# Altium PCB Copy of fotopolim_v0.PcbDoc
Units mm, origin at the board's own origin, x right, y up, seen from the top; angles counter-clockwise.
Board outline 25.02 x 150.11 mm, 2 copper layers (Top Layer, Bottom Layer), stack 1.671 mm thick; 41 components, 27 nets, 125 pads, 0 vias.
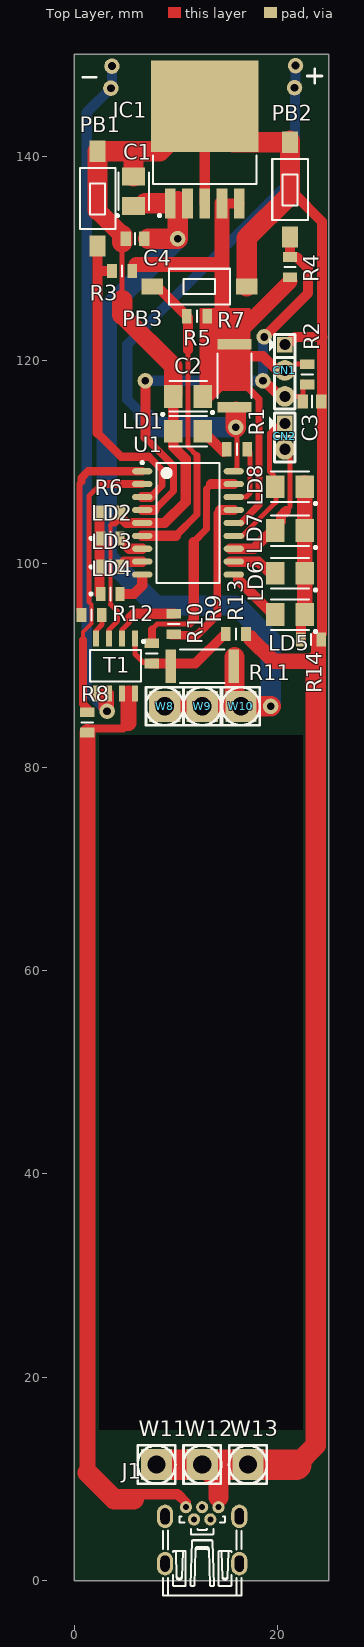
[diagram p0: Top Layer view]
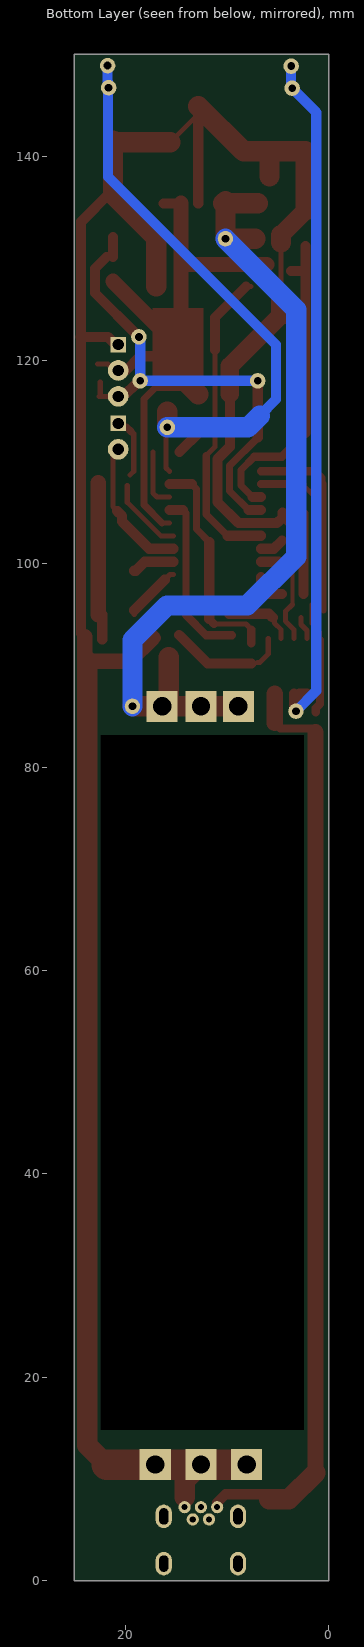
[diagram p1: Bottom Layer view, seen from below]

## Layer stack, top to bottom
Top Layer: signal copper 0.0356
Dielectric: core 1.6, FR-4, Dk 4.8
Bottom Layer: signal copper 0.0356

## Board outline
0,0 0,150.114 25.019,150.114 25.019,0

## Design rules (kind name [scope] priority, off if disabled: settings)
Clearance [All] p1: gap=0.25
PolygonConnect [All] p1: connectstyle=Relief reliefconductorwidth=0.254 reliefentries=4 polygonreliefangle="90 Angle" airgapwidth=0.254
RoutingVias [All] p1: holewidth=0.711 width=1.27 viastyle="Through Hole" minholewidth=0.711 minwidth=1.27 maxholewidth=0.711 maxwidth=1.27
SolderMaskExpansion [All] p1: expansion=0.102
Width [All] p1: maxlimit=5.254 minlimit=0.254 preferedwidth=2
28 further rules are at their usual default settings.

## Components (designator, comment, footprint, x,y, rotation, side; value= is the part's Value field where it differs from the comment)
C1 "10uF" CAPMP3528X210N 5.825,136.625 r90 top
C2 "10uF" CAPMP3528X210N 11.192,116.459 r180 top
C3 "100nF" CAPC2012X135N 23.368,115.951 r180 top
C4 "100nF" CAPC2012X135N 5.969,131.953 r0 top
CN1 "BARRA DE PINOS 1x3 180°" "BARRA DE PINOS 1X3 180 - MACHO" 20.701,121.539 r270 top
CN2 "BARRA DE PINOS 1x2 180°" "BARRA DE PINOS 1X2 180 - MACHO" 20.701,113.792 r270 top
IC1 "LT1764AEQ-3.3#PBF" TO170P1394X457-6N-R900X1060 12.827,141.732 r90 top
J1 "USB" WURTH_651005136521 12.573,7.239 r0 top
LD1 "Red" LEDM3528X210N_RED 11.192,113.03 r0 top
LD2 "Green" LED_OSRAM_LGR971 3.556,102.489 r0 top
LD3 "Green" LED_OSRAM_LGR971 3.556,99.695 r0 top
LD4 "Green" LED_OSRAM_LGR971 3.556,97.028 r0 top
LD5 "Yellow" LEDM3528X210N_YELLOW 21.209,94.996 r180 top
LD6 "Yellow" LEDM3528X210N_YELLOW 21.209,99.06 r180 top
LD7 "Yellow" LEDM3528X210N_YELLOW 21.209,103.251 r180 top
LD8 "Yellow" LEDM3528X210N_YELLOW 21.209,107.569 r180 top
PB1 "Push Button" PB_TYCO_FSMSM 2.286,135.89 r270 top
PB2 "Push Button" PB_TYCO_FSMSM 21.209,136.779 r270 top
PB3 "Push Button" PB_TYCO_FSMSM 12.319,127.254 r180 top
R1 "330" RESC2012X60N 16.002,111.252 r0 top
R2 "10k" RESC2012X60N 22.9,118.625 r270 top
R3 "4k7" RESC2012X60N 4.699,128.778 r0 top
R4 "4k7" RESC2012X60N 21.209,129.159 r270 top
R5 "4k7" RESC2012X60N 12.065,124.333 r0 top
R6 "330" RESC2012X60N 3.556,105.029 r180 top
R7 "360" RESC6331X70N 15.748,118.491 r270 top
R8 "10k" RESC2012X60N 1.275,84.4 r270 top
R9 "4k7" RESC2012X60N 9.779,94.075 r270 top
R10 "4k7" RESC2012X60N 7.62,91.186 r270 top
R11 "47" RESC6331X70N 12.573,89.916 r0 top
R12 "4k7" RESC2012X60N 1.7,94.95 r0 top
R13 "10k" RESC2012X60N 15.875,93.091 r180 top
R14 "330" RESC2012X60N 23.275,92.55 r180 top
T1 "IRF9910Pbf" SOIC127P600X175-8N 4.05,89.95 r270 top
U1 "PIC16F628A-E/SO" SOIC-SO18_L 11.176,104.013 r0 top
W8 "CABO COM CLIP" "CABINHO COM CLIP" 8.89,85.979 r0 top
W9 "CABO COM CLIP" "CABINHO COM CLIP" 12.573,85.979 r0 top
W10 "CABO COM CLIP" "CABINHO COM CLIP" 16.383,85.979 r0 top
W11 "CABO COM CLIP" "CABINHO COM CLIP" 8.077,11.43 r0 top
W12 "CABO COM CLIP" "CABINHO COM CLIP" 12.573,11.43 r0 top
W13 "CABO COM CLIP" "CABINHO COM CLIP" 17.069,11.43 r0 top

## Footprints (in the part's own frame and the unit in brackets; to place one, negate y for a bottom-side part, rotate by r counter-clockwise, add the part's x,y. Pads: shape width x height; smd on the part's side, far side on the other; paste and mask are expansions set on the pad)
"BARRA DE PINOS 1X2 180 - MACHO" [mil]
  rect 60x60 hole 43: 1(0,0)
  round 80 hole 43: 2(100,0)
  silkscreen extent -40,-60 149,40, body extent -49,-48 151,50, height 305
"BARRA DE PINOS 1X3 180 - MACHO" [mil]
  rect 60x60 hole 43: 1(0,0)
  round 80 hole 43: 2(100,0) 3(200,0)
  silkscreen extent -40,-60 249,40, body extent -49,-50 251,48, height 305
"CABINHO COM CLIP" [mm]
  rect 3.064x3.064 hole 1.8: 1(0,0)
  silkscreen extent -1.87,-1.87 1.87,1.89
CAPC2012X135N [mm] "Chip Capacitor, Body 2.0x1.25mm, IPC Medium Density"
  rect 1.05x1.4 smd: 1(-0.9,0) 2(0.9,0)
  silkscreen extent 0,-0.58 0,0.58, body extent -1.05,-0.67 1.05,0.68, height 1.25
CAPMP3528X210N [mm] "Capacitor, Polarized, Molded  Body 3.5x2.8mm, IPC Medium Density"
  rect 1.8x2.25 smd: 1(-1.45,0) 2(1.45,0)
  silkscreen extent -2.52,-1.5 1.85,1.72, body extent -1.85,-1.5 1.85,1.5, height 2.1
LED_OSRAM_LGR971 [mm] "Green Chip LED, 2-Leads, Body 2.0x1.25mm, IPC Medium Density"
  rect 0.9x1.4 smd: 1(-0.95,0) 2(0.95,0)
  silkscreen extent -2.02,-0.65 0,0.65, body extent -1.05,-0.67 1.05,0.68, height 0.9
LEDM3528X210N_RED [mm] "Molded SMD RED LED, 2-Leads, Body 3.5x2.8mm, IPC Medium Density"
  rect 1.8x2.25 smd: 1(-1.45,0) 2(1.45,0)
  silkscreen extent -2.62,-1.5 1.85,1.77, body extent -1.85,-1.5 1.85,1.5, height 2.1
LEDM3528X210N_YELLOW [mm] "Molded SMD YELLOW LED, 2-Leads, Body 3.5x2.8mm, IPC Medium Density"
  rect 1.8x2.25 smd: 1(-1.45,0) 2(1.45,0)
  silkscreen extent -2.63,-1.5 1.85,1.77, body extent -1.85,-1.5 1.85,1.5, height 2.1
PB_TYCO_FSMSM [mm] "Body 3.5x6.0mm, Pushbutton Switch,  TYCO FSMSM Serie"
  rect 2.1x1.6 smd: 1(-4.65,0) 2(4.65,0)
  silkscreen extent -3,-1.75 3,1.75, body extent -5,-1.75 5,1.75, height 4.3
RESC2012X60N [mm] "Chip Resistor, EIA 0805, Metric 2012, Body 2.0x1.2mm, IPC Medium Density"
  rect 0.95x1.4 smd: 1(-1,0) 2(1,0)
  silkscreen extent 0,-0.55 0,0.55, body extent -1.1,-0.67 1.1,0.68, height 0.6
RESC6331X70N [mm] "Chip Resistor, EIA 2512, Metric 6331, 2-Leads, Body 6.3x3.1mm, IPC Medium Density"
  rect 1.05x3.3 smd: 1(-3.1,0) 2(3.1,0)
  silkscreen extent -2.2,-1.65 2.2,1.65, body extent -3.25,-1.65 3.25,1.65, height 0.7
SOIC127P600X175-8N [mm] "SOIC 8, Pitch 1.27mm - Body 4x5mm, IPC Medium Density"
  rect 1.55x0.6 smd: 1(-2.7,1.905) 2(-2.7,0.635) 3(-2.7,-0.635) 4(-2.7,-1.905) 5(2.7,-1.905) 6(2.7,-0.635) 7(2.7,0.635) 8(2.7,1.905)
  silkscreen extent -2.52,-2.5 1.55,2.88, body extent -3.1,-2.5 3.1,2.5, height 1.75
SOIC-SO18_L [mm] "SOIC, 18-Leads, Body 11.5x7.5mm, Pitch 1.27mm, IPC High Density"
  oval 2x0.6 smd: 1(-4.5,5.08) 2(-4.5,3.81) 3(-4.5,2.54) 4(-4.5,1.27) 5(-4.5,0) 6(-4.5,-1.27) 7(-4.5,-2.54) 8(-4.5,-3.81) 9(-4.5,-5.08) 10(4.5,-5.08) 11(4.5,-3.81) 12(4.5,-2.54) 13(4.5,-1.27) 14(4.5,0) 15(4.5,1.27) 16(4.5,2.54) 17(4.5,3.81) 18(4.5,5.08)
  silkscreen extent -4.62,-5.9 3.1,6.05, body extent -3.8,-5.95 3.8,5.95, height 2.65
TO170P1394X457-6N-R900X1060 [mm] "TO, 1.70mm Pitch; 5 Pin, 13.945mm L X 8.89mm W X 4.572mm H body, IPC Medium Density"
  rect 2.95x1.05 smd: 1(-6.3,3.4) 2(-6.3,1.7) 3(-6.3,0) 4(-6.3,-1.7) 5(-6.3,-3.4)
  rect 9x10.6 smd: 6(3.25,0)
  silkscreen extent -7.62,-5.1 -1.6,5.1, body extent -6.93,-5.27 7.11,5.27, height 4.63
WURTH_651005136521 [mm] "Mini USB Type B Horizontal 5 Contacts"
  round 1.2 hole 0.6: 1(-1.6,0) 2(-0.8,-1.2) 3(0,0) 4(0.8,-1.2) 5(1.6,0)
  oval 1.6x2.3 hole 0.9 slot 1.6 at 90 deg: 6(-3.65,-5.55) 6(-3.65,-0.9) 6(3.65,-5.55) 6(3.65,-0.9)
  silkscreen extent -3.85,-8.7 3.85,-0.9, body extent -4.07,-8.7 4.08,0.13, height 3.9

## Part data
C1 C2: library part CTE3528-21_10UF_16V_10%_LESR0800, "Polarised capacitor"
C3 C4: library part CC0805_100NF_50V_10%_X7R, "Non-polarised capacitor"
IC1: "3A, Fast Transient Response, Low Noise, LDO Regulators"
J1: library part WURTH_651005136521, "5 Pin + 1 Shield USB Receptacle"
LD1: library part LED_OSRAM_LST676-Q1R2-1, "LED Red 1C 2A"
LD2 LD3 LD4: library part LED_OSRAM_LGR971, "LED Green 1C 2A"
LD5 LD6 LD7 LD8: library part LED_OSRAM_LYT676-R1S2-26, "LED Yellow 1C 2A"
PB1 PB2 PB3: library part PB_TYCO_FSMSM, "Push-Button Switch SPDT"
R1 R6 R14: library part R0805_330R_0.1%_0.1W_25PPM, "Resistor - 0.1%"
R2 R8 R13: library part R0805_10K_1%_0.125W_100PPM, "Resistor - 1%"
R3 R4 R5 R9 R10 R12: library part R0805_4K7_1%_0.125W_100PPM, "Resistor - 1%"
R7: library part R2512_360R_1%_1W_100PPM, "Resistor - 1%"
R11: library part R2512_47R_1%_1W_100PPM, "Resistor - 1%"
T1: "Dual SO-8 MOSFET For POL Cconverter"
U1: "FLASH-Based 8-Bit CMOS Microcontroller with nanoWatt Technology, 2K (x14-Bit words) FLASH, 224 Bytes SRAM, 18-Pin SOIC, 3.0 to 5.5V Supply Range, Extended Temperature"

## Free pads (board coordinates)
  round 1.524 hole 0.762: 0(3.6,146.75) 0(3.7,148.925) 0(10.16,131.953) 0(15.875,113.411) 0(19.304,85.979) 0(21.65,146.8) 0(21.75,148.975) 1(3.225,85.5) 2(6.985,117.983) 3(18.542,117.983) 4(18.669,122.301)
  rect 1.524x1.524 hole 20 square unplated: 0(12.443,24.876) 0(12.443,34.02) 0(12.443,53.578) 0(12.443,73.136)

## Nets (pads, with @x,y where several pads share a name; then routed paths per layer and width w, separated by ;. In a path a pad name is that pad's centre, name@x,y a point inside that pad or via, vN(x,y) a via of type N, cw(c..) or ccw(c..) an arc to the next point about the centre after c; other vN are vias at no path point)
BAT: C1.1 C4.2 IC1.1 IC1.2 pad.0@10.16,131.953 pad.0@19.304,85.979 R11.2 W8.1 W9.1 W10.1 | length 86
  Top Layer w2: 6.961,135.432 IC1.1 10.16,135.432 ; C4.2@7.239,131.953 10.16,131.953 10.16,135.432 ; W8.1 W9.1 W10.1 ; R11.2@15.748,90.805 15.748,86.614 W10.1 ; pad.0@19.304,85.979 W10.1 ; 10.16,135.432 10.364,135.432 10.16,135.636 10.16,135.432
  Bottom Layer w2: pad.0@10.16,131.953 3.2,124.993 3.2,100.7 8,95.9 15.9,95.9 19.304,92.496 pad.0@19.304,85.979
GND: C1.2 C2.2 C3.1 C4.1 CN1.1 IC1.3 IC1.6 J1.5 LD1.1 PB1.1 PB2.1 PB3.1 R6.1 R13.1 R14.1 T1.3 U1.5 W11.1 W12.1 W13.1 | length 267.4
  Top Layer w0.4: 3.575,96 3.575,103.775
  Top Layer w0.5: T1.3 3.415,93.515 4.25,94.35 4.25,95.325 3.575,96 ; 3.575,103.775 3.95,104.15 ; R6.1@4.318,104.521 R6.1@4.318,105.156 ; 4.699,125.889 C4.1@4.699,131.583 ; IC1.6@12.827,144.198 IC1.6@15.596,141.429
  Top Layer w1: 3.95,104.15 3.95,104.153 R6.1@4.318,104.521 ; R6.1 4.556,104.537 5.08,104.013 U1.5 8.89,104.013 10.95,106.073 10.95,110.282 9.726,111.506 C2.2@9.726,116.713 ; IC1.3 12.827,144.198 IC1.6 ; J1.5 14.173,8.223 ; R13.1@17.002,92.71 R13.1@17.29,92.71 ; CN1.1 20.955,121.539 21.717,122.301 24.384,122.301 ; 21.463,136.525 24.35,133.638 24.35,93.168 R14.1@24,92.818
  Top Layer w1.5: R13.1@17.29,92.71 19.576,90.424 24,90.424 R14.1@24,92.818
  Top Layer w1.8: 2.286,134.736 C4.1@4.699,132.323 ; 4.699,124.46 9.726,119.433 C2.2@9.726,116.713
  Top Layer w2: 2.286,134.736 PB1.1 6.223,140.54 ; 4.699,124.46 4.699,125.889 ; C4.1@4.699,131.583 C4.1@4.699,132.323 ; C1.2 5.825,140.142 6.223,140.54 ; W12.1 14.173,9.83 14.173,8.223 ; IC1.6 8.385,140.54 6.223,140.54 ; IC1.6@15.596,141.429 PB2.1 ; PB3.1 16.969,132.031 21.209,136.271 PB2.1@21.209,141.605 ; 21.844,11.43 23.749,13.335 23.749,90.424
  Top Layer w3: W11.1 W12.1 W13.1 21.844,11.43
NetC3_2: C3.2 CN1.3 pad.2 pad.3 pad.4 PB2.2 R2.2 R4.1 U1.4 | length 50.2
  Top Layer w0.5: CN1.3@20.193,116.459 C3.2@22.595,116.459 ; R4.1 R4.1@21.86,130.159 ; C3.2@22.468,116.586 R2.2@22.468,117.861
  Top Layer w0.7: 6.985,112.395 9.75,109.63 9.75,107.159 7.874,105.283
  Top Layer w1: U1.4 7.874,105.283 ; 6.985,112.395 pad.2 ; pad.3@18.796,117.856 CN1.3@20.193,116.459 ; pad.4@18.796,122.174 18.796,122.428 22.987,126.619 22.987,129.032 R4.1@21.86,130.159 ; R4.1 PB2.2
  Bottom Layer w1: pad.2 pad.3 18.542,122.174 pad.4
NetCN2_1: CN2.1 LD8.2 U1.13 | length 14.1
  Top Layer w0.5: U1.13@15.295,102.743 16.51,102.743 19.812,106.045 LD8.2@19.812,107.696 ; 19.375,113 19.177,112.802 19.177,109.093 19.558,108.712 ; CN2.1@20.447,113.792 CN2.1@21.082,113.792
  Top Layer w0.7: 19.418,112.968 19.899,113.449 20.104,113.449 CN2.1@20.447,113.792
NetCN2_2: CN2.2 LD7.2 U1.12 | length 13.6
  Top Layer w0.5: 20.8,105.2 21.209,105.609 21.209,110.871 CN2.2@21.463,111.125
  Top Layer w1: U1.12@15.295,101.473 17.653,101.473 20.32,104.14 20.32,104.695 20.8,105.175 20.8,105.2
NetLD1_2: LD1.2 R1.1 | length 2.9
  Top Layer w1: LD1.2 R1.1@14.674,110.998
NetLD2_1: LD2.1 LD3.1 LD4.1 R6.2 | length 7.9
  Top Layer w1: LD4.1@2.479,97.028 2.479,99.695 2.479,102.489 R6.2@2.479,104.952
NetLD2_2: LD2.2 U1.7 | length 2.4
  Top Layer w1: LD2.2@4.597,102.271 5.395,101.473 U1.7
NetLD3_2: LD3.2 U1.8 | length 2.2
  Top Layer w1: LD3.2@4.603,99.918 4.887,100.203 U1.8
NetLD4_2: LD4.2 U1.9 | length 3.2
  Top Layer w1: LD4.2@4.625,97.028 5.842,97.028 6.676,97.862 U1.9@6.676,98.679
NetLD5_1: LD5.1 LD6.1 LD7.1 LD8.1 R14.2 | length 15.8
  Top Layer w0.5: LD5.1@22.275,94.996 LD5.1
  Top Layer w1: R14.2@22.275,92.583 LD5.1@22.275,94.996
  Top Layer w1.5: LD5.1 LD8.1@22.659,107.95
NetLD5_2: LD5.2 U1.10 | length 5.7
  Top Layer w0.5: U1.10@15.295,98.933 15.617,98.933 16.125,98.425 ; LD5.2@19.124,94.996 LD5.2@19.124,95.426
  Top Layer w1: 16.125,98.425 LD5.2@19.124,95.426
NetLD6_2: LD6.2 U1.11 | length 4.2
  Top Layer w1: U1.11@15.295,100.203 18.098,100.203 18.987,99.314 LD6.2@19.124,99.314
NetPB1_2: PB1.2 R3.1 U1.3 | length 31.6
  Top Layer w0.7: 7.331,110.525 8.625,109.231 8.625,107.685 U1.3@7.493,106.553
  Top Layer w0.8: 2.286,112.839 4.6,110.525 7.331,110.525
  Top Layer w1: 2.286,112.839 PB1.2 ; 2.286,128.778 R3.1 ; U1.3 U1.3@7.493,106.553
NetPB3_2: PB3.2 R5.1 U1.6 | length 30.8
  Top Layer w0.5: PB3.2@7.653,127.27 PB3.2 PB3.2@8.144,127.254 ; 11.192,121.027 11.192,111.49 12.05,110.632
  Top Layer w0.7: 9.968,102.743 12.05,104.825 12.05,110.632
  Top Layer w1: U1.6 9.968,102.743 ; PB3.2@8.144,127.254 11.192,124.206 11.192,121.027
NetR1_2: R1.2 U1.16 | length 5.8
  Top Layer w0.5: U1.16 16.891,106.553 17.272,106.934 R1.2@17.272,110.998
NetR7_2: pad.0@15.875,113.411 pad.0@21.65,146.8 pad.0@21.75,148.975 R7.2 U1.18 | length 58
  Top Layer w0.5: U1.18 16.002,109.419 16.002,113.157 pad.0@15.875,113.411
  Top Layer w2: pad.0@15.875,113.411 R7.2@15.875,114.935
  Bottom Layer w1: 6.8,114.55 5.2,116.15 5.2,121.55 21.7,138.05 pad.0@21.7,147.425 ; pad.0@21.75,146.9 pad.0@21.75,148.975
  Bottom Layer w2: 6.8,114.55 7.939,113.411 pad.0@15.875,113.411
NetR8_1: R8.1 U1.2 | length 27.6
  Top Layer w0.4: 0.85,92.5 0.85,93.275 1.7,94.125 1.7,95.979 1.454,96.225
  Top Layer w0.5: 1.454,96.225 1.454,106.679 2.598,107.823
  Top Layer w0.8: 0.85,92.5 0.85,86.225 1.275,85.8 R8.1 ; 2.598,107.823 U1.2
NetR9_1: R9.1 T1.2 | length 7
  Top Layer w0.5: T1.2 4.685,93.51 5.35,94.175 5.35,94.9
  Top Layer w1: 5.5,94.7 5.875,95.075 R9.1
NetR9_2: R9.2 U1.15 | length 17.1
  Top Layer w0.7: 14.05,94.949 14.05,104.982 14.351,105.283
  Top Layer w0.8: R9.2@9.525,92.964 12.065,92.964 14.05,94.949
  Top Layer w1: 14.351,105.283 U1.15
NetR10_1: R10.1 U1.17 | length 22.1
  Top Layer w0.5: 7.62,93.545 8.15,94.075 11.271,94.075
  Top Layer w0.7: 11.75,102.15 13,103.4 13,107.361 13.462,107.823
  Top Layer w0.8: R10.1 7.62,93.545 ; 11.271,94.075 11.75,94.554
  Top Layer w1: 11.75,94.554 11.75,102.15 ; 13.462,107.823 U1.17
NetR10_2: R10.2 R11.1 R13.2 T1.1 | length 11.2
  Top Layer w0.5: T1.1 5.955,91.125 6.78,90.3 6.988,90.3 R10.2@6.985,90.297
  Top Layer w1: R10.2 11.902,90.186 R13.2@14.714,92.998
NetR12_1: R12.1 U1.1 | length 19.4
  Top Layer w0.6: R12.1@0.528,95.4 0.528,107.903 0.7,108.075
  Top Layer w0.8: 0.7,108.075 0.7,108.436 1.357,109.093 U1.1
NetR12_2: R12.2 T1.4 | length 2.3
  Top Layer w0.5: T1.4 2.145,93.445 2.725,94.025 R12.2@2.725,94.725
NetT1_5: pad.0@3.6,146.75 pad.0@3.7,148.925 pad.1 T1.5 T1.6 | length 69
  Top Layer w1: T1.5 2.85,87.25 ; 2.85,86.55 2.9,86.5 2.9,85.825 pad.1 3.415,85.69 T1.6
  Bottom Layer w1: pad.1 1.225,87.5 1.225,144.375 3.7,146.85 pad.0@3.7,148.925
VCC: C2.1 CN1.2 IC1.4 IC1.5 R2.1 R3.2 R4.2 R5.2 R7.1 U1.14 | length 68.9
  Top Layer w0.5: U1.14 U1.14@16.383,104.013 ; CN1.2@19.939,118.999 CN1.2 CN1.2@20.844,118.999 ; CN1.2@20.701,118.856 CN1.2@20.844,118.999 ; R4.2@21.209,127.762 R4.2 ; R2.1@22.733,119.618 21.701,119.618 21.082,118.999 CN1.2@20.844,118.999
  Top Layer w0.7: 15.748,118.618 18.161,116.205 18.161,109.347 18.161,105.791 U1.14@16.383,104.013
  Top Layer w1: IC1.4 IC1.5 ; 15.748,120.396 18.542,120.396 CN1.2@19.939,118.999
  Top Layer w1.5: R3.2@6.096,129.413 14.527,129.413 ; R5.2 15.807,121.591 16.002,121.591 R7.1@15.748,121.845 ; IC1.4 14.527,129.413 ; 15.748,120.396 R7.1@15.748,121.337 ; R4.2@21.209,127.762 15.748,122.301 R7.1@15.748,121.845 ; 14.527,129.413 14.527,123.066 R7.1@15.748,121.845
  Top Layer w2: C2.1@12.842,116.659 14.547,118.364 16.002,118.364
  Top Layer w3: 15.748,118.618 15.748,120.396
VCC_5V: J1.1 R8.2 T1.7 T1.8 | length 91.7
  Top Layer w0.8: R8.2@1.3,83.425 1.675,83.8 4.775,83.8 5.325,84.35
  Top Layer w1: 5.75,8.509 10.16,8.509 10.973,7.696 J1.1
  Top Layer w1.6: 1.3,10.638 R8.2@1.3,83.425 ; 5.325,84.35 5.325,87.225
  Top Layer w2: 1.3,10.638 3.913,8.025 5.875,8.025
pads on no net: J1.2 J1.3 J1.4 J1.6

## Other copper
Top Layer:
  rectangle net VCC: 12.325,116.975 17.325,125.15

## Silkscreen, mask and mechanical layers (free items; w line width, h text height)
Top Overlay:
  lines w0.254: 0.825,147.85 2.15,147.85 ; 22.9,147.95 24.35,147.95 ; 23.65,147.25 23.65,148.65
Mechanical 1:
  the board outline again, w0.254

## Dimensions
0,0 to 25.019,0 on Mechanical 1
0,150.114 to 0,0 on Mechanical 1